# EAGLE board Wiring Components 02 (EAGLE 9.7.0)

Size 160.03 x 136.07 mm. Coordinates in mm from the lower left corner, seen from the top.
Outline: 0,0 160.03,0 160.03,136.07 0,136.07 0,0
Copper layers (1*16): Top 0.035mm / dielectric 1.5mm / Bottom 0.035mm
Design rules "default": minimum track width 6mil, minimum drill 0.35mm, track to track 6mil, track to pad 6mil, pad to pad 6mil, via to via 6mil, smd to smd 6mil, copper to edge 40mil, drill to drill 6mil, minimum pad ring 10mil, minimum via ring 8mil, stop-mask expansion 4mil, vias tented up to drill 0mil, thermal gap 10mil

## Footprints (pad centres in the part's own frame; a part is rotated, then mirrored left to right if it is on the bottom)
BATTERY-GENERIC = drill 1.118 pad 3.15 octagon: + 2.54,0; - -2.54,0
CAP-THRU-2.54MM = drill 1.016 pad 1.88: 1 -1.27,0; 2 1.27,0
PIEZO = drill 1 pad 1.6: 1 -3.5,0; 2 3.5,0
RESAD1016W63L850D250B = drill 0.83 pad 1.43: 1 -5.08,0; 2 5.08,0
1X04 = drill 1.016 long: 1 -3.81,0; 2 -1.27,0; 3 1.27,0; 4 3.81,0
DIP826W53P254L959H508Q8B = drill 0.786 pad 1.386: 1 -4.13,3.81; 2 -4.13,1.27; 3 -4.13,-1.27; 4 -4.13,-3.81; 5 4.13,-3.81; 6 4.13,-1.27; 7 4.13,1.27; 8 4.13,3.81
ARDUINO-UNO-R3-SHIELD = drill 1.016 pad 1.88: 3.3V 24.13,-2.54; 5V 24.13,0; A0 24.13,12.7; A1 24.13,15.24; A2 24.13,17.78; A3 24.13,20.32; A4 24.13,22.86; A5 24.13,25.4; AREF -24.13,-13.97; D2 -24.13,20.32; D3 -24.13,17.78; D4 -24.13,15.24; D5 -24.13,12.7; D6 -24.13,10.16; D7 -24.13,7.62; D8 -24.13,3.81; D9 -24.13,1.27; D10 -24.13,-1.27; D11 -24.13,-3.81; D12 -24.13,-6.35; D13 -24.13,-8.89; GND@0 24.13,2.54; GND@1 24.13,5.08; GND@2 -24.13,-11.43; IOREF 24.13,-7.62; NC 24.13,-10.16; RES 24.13,-5.08; RX -24.13,25.4; SCL -24.13,-19.05; SDA -24.13,-16.51; TX -24.13,22.86; VIN 24.13,7.62
LCD-I2C = drill 1.016 long: 1 -19.05,-5.08; 2 -19.05,-7.62; 3 -19.05,-10.16; 4 -19.05,-12.7

## Placement (x,y rotation side)
BAT1  9V  [BATTERY-GENERIC]  14.45,109.61 90 top
C1  100n  [CAP-THRU-2.54MM]  137.56,99.16 0 top
PIEZO1  PIEZO  [PIEZO]  146.45,95.35 270 top
R1  1.5k  [RESAD1016W63L850D250B]  55.01,124.56 0 top
R2  1.3k  [RESAD1016W63L850D250B]  65.17,122.02 0 top
R3  620  [RESAD1016W63L850D250B]  75.33,124.56 0 top
R4  1.1k  [RESAD1016W63L850D250B]  85.49,122.02 0 top
R5  1k  [RESAD1016W63L850D250B]  95.65,124.56 0 top
R6  910  [RESAD1016W63L850D250B]  105.81,122.02 0 top
R7  390  [RESAD1016W63L850D250B]  115.97,124.56 0 top
R9  6.2k  [RESAD1016W63L850D250B]  126.13,122.02 0 top
RA  1k  [RESAD1016W63L850D250B]  138.83,127.1 270 top
S1  PINHD-1X04_1X04M  [1X04]  47.39,110.59 0 top
S2  PINHD-1X04_1X04M  [1X04]  57.55,110.59 0 top
S3  PINHD-1X04_1X04M  [1X04]  67.71,110.59 0 top
S4  PINHD-1X04_1X04M  [1X04]  77.87,110.59 0 top
S5  PINHD-1X04_1X04M  [1X04]  88.03,110.59 0 top
S6  PINHD-1X04_1X04M  [1X04]  98.19,110.59 0 top
S7  PINHD-1X04_1X04M  [1X04]  108.35,110.59 0 top
S8  PINHD-1X04_1X04M  [1X04]  118.51,110.59 0 top
U1  LM555_DIP  [DIP826W53P254L959H508Q8B]  140.1,110.59 90 top
U2  ARDUINO-UNO-R3-SHIELD  [ARDUINO-UNO-R3-SHIELD]  47.88,29.84 270 top
U3  LCD-16X2-I2CSUNFOUNDER-IIC  [LCD-I2C]  66.3,46.23 0 top

## Library data of the parts
BAT1 C1 PIEZO1 R1-R7 R9 RA S1-S8 U2 U3 = Tinkercad
U1 = Tinkercad; CATEGORY: IC_Clock-Timing; CURRENT-SUPPLY: 10mA; DESCRIPTION: IC OSC SINGLE TIMER 100KHZ 8-DIP; FREQUENCY: 100kHz; MANUFACTURER: Texas Instruments; MPN: LM555CN/NOPB; OPERATING_TEMP: 0°C to 70°C; PART_STATUS: Active; ROHS_COMPLIANT: ROHS3 Compliant; SUB-CATEGORY: Timer

## Nets
BAT1+: BAT1.+ RA.1 U1.4 U1.8
BAT1-: BAT1.- C1.1 PIEZO1.2 U1.1
S1_3: R1.1 S1.3
S2_3: R1.2 R2.1 S2.3
S3_3: R2.2 R3.1 S3.3
S4_3: R3.2 R4.1 S4.3
S5_3: R4.2 R5.1 S5.3
S6_3: R5.2 R6.1 S6.3
S7_3: R6.2 R7.1 S7.3
S8_2: C1.2 S1.2 S2.2 S3.2 S4.2 S5.2 S6.2 S7.2 S8.2 U1.2 U1.6
S8_3: R7.2 R9.1 S8.3
U1_DIS: R9.2 RA.2 U1.7
U1_OUT: PIEZO1.1 U1.3
U2_5V: U2.5V U3.2
U2_GND: U2.GND@0 U2.GND@1 U2.GND@2 U3.1
U2_SCL: U2.SCL U3.4
U2_SDA: U2.SDA U3.3

## Tracks (layer width: path | path; a pad name or v marks a point on that pad's centre or on a via)
BAT1+  (3 unrouted)
BAT1-  (3 unrouted)
S1_3  (1 unrouted)
S2_3  (2 unrouted)
S3_3  (2 unrouted)
S4_3  (2 unrouted)
S5_3  (2 unrouted)
S6_3  (2 unrouted)
S7_3  (2 unrouted)
S8_2  (10 unrouted)
S8_3  (2 unrouted)
U1_DIS  (2 unrouted)
U1_OUT  (1 unrouted)
U2_5V  (1 unrouted)
U2_GND  (3 unrouted)
U2_SCL  (1 unrouted)
U2_SDA  (1 unrouted)